# Altium PCB converter2.PcbDoc
Units mm, origin at the board's own origin, x right, y up, seen from the top; angles counter-clockwise.
Board outline 50 x 30 mm, 2 copper layers (Top Layer, Bottom Layer); 66 components, 35 nets, 206 pads, 51 vias.
Unrouted connection lines stored in the file: 1.
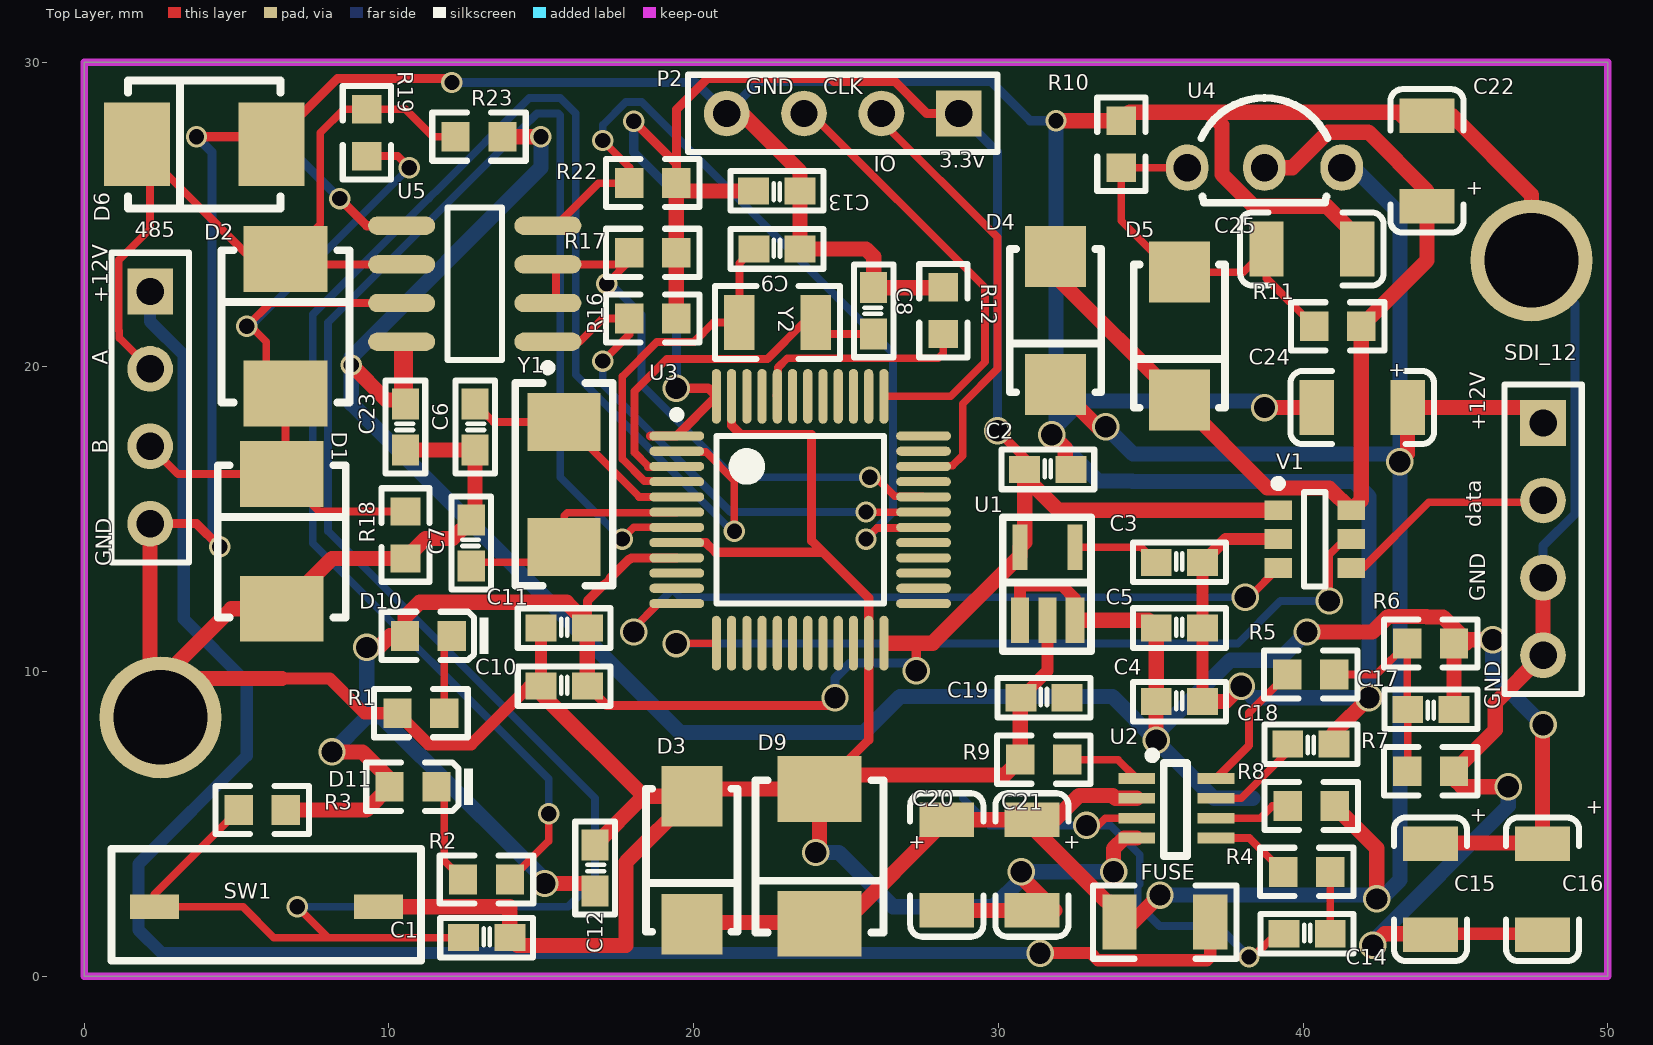
[diagram p0: Top Layer view]
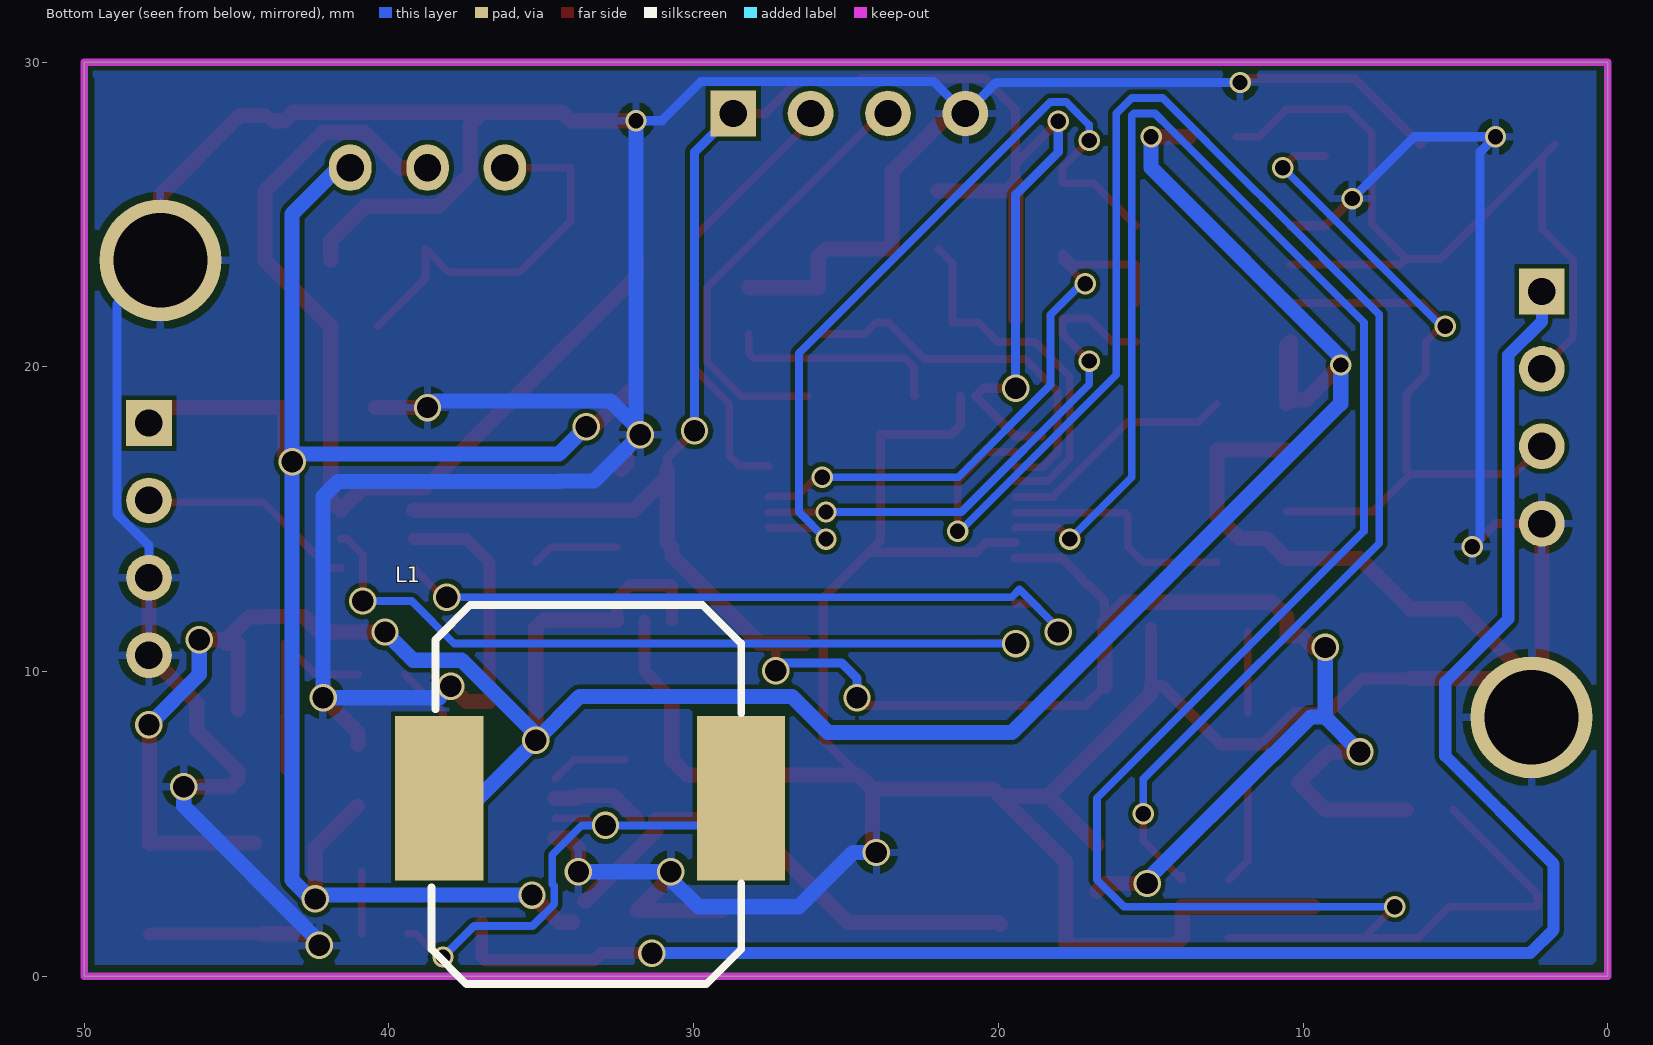
[diagram p1: Bottom Layer view, seen from below]

## Layer stack, top to bottom
Top Solder: solder mask 0.0102, Solder Resist, Dk 3.5
Top Layer: signal copper 0.0356
Dielectric 1: dielectric 0.32, FR-4, Dk 4.8
Bottom Layer: signal copper 0.0356
Bottom Solder: solder mask 0.0102, Solder Resist, Dk 3.5

## Board outline
0,0 50,0 50,30 0,30

## Design rules (kind name [scope] priority, off if disabled: settings)
Clearance Clearance_6 [All] p1 off: gap=0.152
Clearance Clearance_5 [InComponent('D6')] p2 off: gap=0
Clearance Clearance_4 [All] p3 off: gap=0.254
Clearance Clearance_1 [InComponent('U3')] p4: gap=0.2
Clearance Clearance_2 [InComponent('C24')] p5: gap=0.2
Clearance Clearance_3 [InComponent('C22')] p6: gap=0.2
Clearance [All] p7: gap=0.152
PolygonConnect [All] p1: connectstyle=Relief reliefconductorwidth=0.254 reliefentries=4 polygonreliefangle="90 Angle" airgapwidth=0.254
RoutingVias [All] p1: holewidth=0.5 width=0.7 viastyle="Through Hole" minholewidth=0.3 minwidth=0.5 maxholewidth=0.7 maxwidth=0.9
SolderMaskExpansion [All] p1: expansion=0.102
Width GND [InNet('GND')] p1: maxlimit=0.5 minlimit=0.2 preferedwidth=0.5
Width 3.3V [InNet('VCC3V3')] p2: maxlimit=0.5 minlimit=0.2 preferedwidth=0.5
Width 3.6V [InNet('VCC3.6V')] p3: maxlimit=0.5 minlimit=0.2 preferedwidth=0.5
Width 12V [InNet('12V')] p4: maxlimit=0.5 minlimit=0.2 preferedwidth=0.5
Width 12VIN [InNet('12VIN')] p5: maxlimit=0.5 minlimit=0.2 preferedwidth=0.4
Width 5V [InNet('5V')] p6: maxlimit=0.5 minlimit=0.2 preferedwidth=0.5
Width [All] p7: maxlimit=0.254 minlimit=0.2 preferedwidth=0.254
30 further rules are at their usual default settings.

## Components (designator, comment, footprint, x,y, rotation, side; value= is the part's Value field where it differs from the comment)
485 "485_4PIN" HDR1X4 2.159,22.479 r270 top (schematic designator header1)
C1 "104,0603" C0603 13.206,1.27 r180 top
C2 "电容106" C0603 31.625,16.637 r180 top
C3 "电容223" C0603 35.943,13.589 r180 top
C4 "电容105" C0603 35.943,9.017 r180 top
C5 "电容104" C0603 35.943,11.43 r180 top
C6 "20P,0603" C0603 12.827,18.032 r90 top
C7 "20P,0603" C0603 12.7,14.224 r270 top
C8 "10P,0603" C0603 25.908,21.844 r270 top
C9 "10P,0603" C0603 22.733,23.876 r180 top
C10 "104,0603" C0603 15.75,9.525 r180 top
C11 "104,0603" C0603 15.75,11.43 r180 top
C12 "104,0603" C0603 16.764,3.556 r90 top
C13 "104,0603" C0603 22.731,25.781 r0 top
C14 "0.1uF,0603" C0603 40.134,1.397 r180 top
C15 "Cap 1206" LC-1206+ 44.196,2.887 r270 top
C16 "Cap 1206" LC-1206+ 47.879,2.887 r270 top
C17 "33pF,0603" C0603 44.198,8.763 r0 top
C18 "0.1uF,0603" C0603 40.259,7.62 r0 top
C19 "1NF,0603" C0603 31.498,9.144 r180 top
C20 "Cap 1206" LC-1206+ 28.321,3.683 r270 top
C21 "Cap 1206" LC-1206+ 31.115,3.683 r270 top
C22 "Cap 1206" LC-1206+ 44.055,26.733 r90 top
C23 "100nF,0603" C0603 10.541,18.032 r270 top
C24 "Cap 1206" LC-1206+ 41.974,18.655 r180 top
C25 "Cap 1206" LC-1206+ 40.263,23.89 r0 top
D1 "P6SMB6.8CA" LC-SMB(DO-214AA)_S1 6.477,14.275 r270 top
D2 "P6SMB6.8CA" LC-SMB(DO-214AA)_S1 6.604,21.336 r270 top
D3 "Diode SMA/DO-214AC" LC-SMA(DO-214AC)_S1 19.939,3.81 r90 top
D4 "Diode SMA/DO-214AC" LC-SMA(DO-214AC)_S1 31.877,21.522 r90 top
D5 "Diode SMA/DO-214AC" LC-SMA(DO-214AC)_S1 35.941,21.014 r90 top
D6 "P6SMB6.8CA" LC-SMB(DO-214AA)_S1 3.937,27.305 r0 top
D9 "P6SMB18CA" LC-SMB(DO-214AA)_S1 24.13,3.937 r90 top
D10 "绿灯 0603" LC-0603_LED_S1 11.295,11.176 r180 top
D11 "黄灯 0603" LC-0603_LED_S1 10.787,6.223 r180 top
FUSE "16V5A,1206" LC-1206_R 35.467,1.778 r180 top
L1 "CDRH104R-5R2" SMD 38.348,5.842 r270 bottom
P2 "SWD" HDR1X4 28.702,28.321 r180 top
R1 "1K" LC-0603_R 11.049,8.636 r180 top
R2 "1K" LC-0603_R 13.2,3.175 r0 top
R3 "10K" LC-0603_R 5.842,5.461 r0 top
R4 "20R" LC-0603_R 40.124,3.429 r180 top
R5 "20K" LC-0603_R 40.251,9.906 r180 top
R6 "40.2K" LC-0603_R 44.188,10.922 r180 top
R7 "7.5K" LC-0603_R 44.188,6.731 r180 top
R8 "100K" LC-0603_R 40.267,5.588 r0 top
R9 "75K" LC-0603_R 31.488,7.112 r180 top
R10 "1.1K" LC-0603_R 34.036,27.313 r90 top
R11 "560R" LC-0603_R 41.14,21.336 r180 top
R12 "10K" LC-0603_R 28.194,21.852 r270 top
R16 "10K" LC-0603_R 18.661,21.59 r0 top
R17 "10K" LC-0603_R 18.661,23.749 r0 top
R18 "10K" LC-0603_R 10.541,14.486 r270 top
R19 "120R" LC-0603_R 9.271,27.686 r270 top
R22 "10K" LC-0603_R 18.661,26.035 r0 top
R23 "10K" LC-0603_R 12.954,27.559 r180 top
SDI_12 "SDI_4PIN" HDR1X4 47.879,18.161 r270 top (schematic designator header2)
SW1 "SW-PB_V" 3.8*6.1微动开关 9.652,2.286 r180 top
U1 "RT9193" SOT-23-5 31.612,12.884 r0 top
U2 "MP2315" TSOT23-8 33.782,3.698 r0 top
U3 "STM32F030(051)C8T6" 48P 23.495,14.986 r0 top
U4 "LM317L" TO-92-0.6 38.735,27.113 r0 top
U5 "SN65LBC184" SO8_N 12.814,22.733 r180 top
V1 "SDI_6" SOT23-6_L 40.386,14.351 r0 top
Y1 "晶振8MHZ" LC-SMD-5032_2P 15.748,16.147 r90 top
Y2 "晶振32.768KHZ" "LC-SMD-3215_2P FC - 135" 22.753,21.463 r0 top

## Footprints (in the part's own frame and the unit in brackets; to place one, negate y for a bottom-side part, rotate by r counter-clockwise, add the part's x,y. Pads: shape width x height; smd on the part's side, far side on the other; paste and mask are expansions set on the pad)
3.8*6.1微动开关 [mm]
  rect 1.6x0.8 smd: 1(0,0) 2(7.35,0)
  silkscreen extent -1.4,-1.91 8.76,1.78
48P [mm]
  oval 1.8x0.3 smd: 1(-4.05,2.75) 2(-4.05,2.25) 3(-4.05,1.75) 4(-4.05,1.25) 5(-4.05,0.75) 6(-4.05,0.25) 7(-4.05,-0.25) 8(-4.05,-0.75) 9(-4.05,-1.25) 10(-4.05,-1.75) 11(-4.05,-2.25) 12(-4.05,-2.75) 25(4.05,-2.75) 26(4.05,-2.25) 27(4.05,-1.75) 28(4.05,-1.25) 29(4.05,-0.75) 30(4.05,-0.25) 31(4.05,0.25) 32(4.05,0.75) 33(4.05,1.25) 34(4.05,1.75) 35(4.05,2.25) 36(4.05,2.75)
  oval 0.3x1.8 smd: 13(-2.75,-4.05) 14(-2.25,-4.05) 15(-1.75,-4.05) 16(-1.25,-4.05) 17(-0.75,-4.05) 18(-0.25,-4.05) 19(0.25,-4.05) 20(0.75,-4.05) 21(1.25,-4.05) 22(1.75,-4.05) 23(2.25,-4.05) 24(2.75,-4.05) 37(2.75,4.05) 38(2.25,4.05) 39(1.75,4.05) 40(1.25,4.05) 41(0.75,4.05) 42(0.25,4.05) 43(-0.25,4.05) 44(-0.75,4.05) 45(-1.25,4.05) 46(-1.75,4.05) 47(-2.25,4.05) 48(-2.75,4.05)
  silkscreen extent -4.17,-2.75 2.75,3.57, body extent -3.5,-3.5 3.5,3.5, height 1.6
C0603 [mil]
  rect 40x35 smd: 1(-29.92,0) 2(29.92,0)
  silkscreen extent -60,-26 60,26
HDR1X4 [mm] "Connector; Header; 4 Position"
  rect 1.5x1.5 hole 0.9: 1(0,0)
  round 1.5 hole 0.9: 2(2.54,0) 3(5.08,0) 4(7.62,0)
  silkscreen extent -1.27,-1.27 8.89,1.27
LC-0603_LED_S1 [mm]
  rect 0.93x0.98 smd: A(0.77,0) K(-0.77,0)
  silkscreen extent -1.98,-0.79 1.54,0.79, body extent -0.8,-0.4 0.8,0.4, height 0.6
LC-0603_R [mm]
  rect 0.93x0.98 smd: 1(-0.77,0) 2(0.77,0)
  silkscreen extent -1.53,-0.79 1.54,0.79, body extent -0.85,-0.4 0.85,0.4, height 0.56
LC-1206+ [mm]
  rect 1.13x1.8 smd: 1(-1.46,-0.014) 2(1.52,-0.014)
  silkscreen extent -2.33,-1.21 2.38,1.19, body extent -1.57,-0.83 1.63,0.77, height 1
LC-1206_R [mm]
  rect 1.13x1.8 smd: 1(-1.49,0) 2(1.49,0)
  silkscreen extent -2.36,-1.2 2.35,1.2, body extent -1.7,-0.86 1.65,0.87, height 0.85
LC-SMA(DO-214AC)_S1 [mm]
  rect 2x2 smd: 1(2.1,0) 2(-2.1,0)
  silkscreen extent -2.35,-1.5 2.35,1.5
LC-SMB(DO-214AA)_S1 [mm]
  rect 2.159x2.743 smd: 1(2.21,0) 2(-2.21,0)
  silkscreen extent -2.5,-2.1 2.5,2.1
"LC-SMD-3215_2P FC - 135" [mm]
  rect 1x1.8 smd: 1(-1.25,0) 2(1.25,0)
  silkscreen extent -2.05,-1.2 2.05,1.2
LC-SMD-5032_2P [mm]
  rect 1.9x2.4 smd: 1(-2.05,0) 2(2.05,0)
  silkscreen extent -3.32,-1.6 3.32,1.6
SMD [mm]
  rect 5.4x2.9 smd: 1(0,9.9) 2(0,0)
  silkscreen extent -6.35,-0.25 6.1,9.91
SO8_N [mm] "SOIC, 8-Leads, Body 4.9x3.9mm, Pitch 1.27mm, IPC Medium Density"
  oval 2.2x0.6 smd: 1(-2.4,1.905) 2(-2.4,0.635) 3(-2.4,-0.635) 4(-2.4,-1.905) 5(2.4,-1.905) 6(2.4,-0.635) 7(2.4,0.635) 8(2.4,1.905)
  silkscreen extent -2.53,-2.5 0.9,2.88, body extent -2,-2.5 2,2.5, height 1.75
SOT23-6_L [mm] "SOT23, 6-Leads, Body 2.9x1.6mm, Pitch 0.95mm, Lead Span 2.7mm, IPC High Density"
  rect 0.9x0.65 smd: 1(-1.2,0.95) 2(-1.2,0) 3(-1.2,-0.95) 4(1.2,-0.95) 5(1.2,0) 6(1.2,0.95)
  silkscreen extent -1.32,-1.55 0.35,1.95, body extent -0.9,-1.55 0.9,1.55, height 1.45
SOT-23-5 [mm]
  rect 0.6x1.5 smd: 1(-0.9,-1.2) 2(0,-1.2)
  rect 0.63x1.5 smd: 3(0.9,-1.2)
  rect 0.5x1.5 smd: 4(0.9,1.2) 5(-0.9,1.2)
  silkscreen extent -1.47,-2.21 1.43,2.18
TO-92-0.6 [mm] "TO-92"
  oval 1.397x1.524 hole 0.9: 1(-2.54,-0.57) 2(0,-0.57) 3(2.54,-0.57)
  silkscreen extent -2.08,-1.72 2.08,1.72, body extent -2.87,-2.09 2.87,2.09, height 10.33
TSOT23-8 [mm] "TSOT23-8"
  rect 1.2x0.35 smd: 1(0.762,2.794) 2(0.762,2.144) 3(0.762,1.494) 4(0.762,0.844) 5(3.362,0.844) 6(3.362,1.494) 7(3.362,2.144) 8(3.362,2.794)
  silkscreen extent 1.14,0.25 2.41,3.68

## Part data
C1 C2 C3 C4 C5 C6 C7 C8 C9 C10 C11 C12 C13 C14 C17 C18 C19 C23: library part Cap, "Capacitor"
C15 C16 C20 C21 C22 C24 C25: library part "Cap Pol2", "Polarized Capacitor (Axial)"
D1 D2 D6 D9: library part "SMB/DO-214AA P6SMB6.8CA", "TVS"
D3: library part "Diode 1N4007", "1 Amp General Purpose Rectifier"
D4 D5: library part "Diode 1N4001", "1 Amp General Purpose Rectifier"
D10: library part "0603 绿灯", "发光二极管"
D11: library part "0603 黄灯", "发光二极管"
FUSE: library part "1206 180Ω (1800) 1%", "贴片电阻"
L1: library part Inductor, "Inductor"
P2: library part "Header 4", "Header, 4-Pin"
R1 R2 R3 R4 R5 R6 R7 R8 R9 R10 R11 R12: library part Res2, "Resistor"
R16 R17 R18 R19 R22 R23: library part "Res Semi", "Semiconductor Resistor"
SW1: "SWITCH"
U1: library part RT9193X_5P
U3: library part STM32F030C8T6
U4: "Linear Regulator"
U5: library part SN75LBC184
Y1 Y2: library part "SMD-5032_2P 11.0592MHZ 20PF 20PPM", "贴片晶振"

## Free pads (board coordinates)
  round 4 hole 3.1: 1(2.5,8.5) 2(47.5,23.5)

## Via types
v1: diameter 0.9, hole 0.7, Top Layer to Bottom Layer, 30 vias
v2: diameter 0.7, hole 0.5, Top Layer to Bottom Layer, 21 vias

## Nets (pads, with @x,y where several pads share a name; then routed paths per layer and width w, separated by ;. In a path a pad name is that pad's centre, name@x,y a point inside that pad or via, vN(x,y) a via of type N, cw(c..) or ccw(c..) an arc to the next point about the centre after c; other vN are vias at no path point)
5V: C4.2 C5.2 C15.1 C16.1 C17.2 C23.1 L1.2 R6.1 R23.1 U1.1 U1.3 U5.8 | length 92.1
  Top Layer w0.4: U1.1 30.712,12.805 30.743,12.836 32.079,12.836 32.512,12.403 U1.3
  Top Layer w0.5: v2(8.763,20.066) 9.91,18.919 10.414,18.919 U5.8 10.541,20.701 C23.1 ; R23.1 v2(14.986,27.559) ; U1.3 34.929,11.684 C5.2 C4.2 35.179,9.013 v1(35.179,7.747) ; v1(40.132,11.303) 42.275,11.303 42.786,11.814 44.05,11.814 44.07,11.794 44.594,11.794 R6.1@45.339,11.049 ; C15.1@44.421,4.377 C16.1@47.865,4.377 ; C17.2 R6.1@44.958,10.906 ; v1(46.228,11.049) R6.1@45.339,11.049 ; C16.1 C16.1@47.865,4.377 ; v1@47.865,8.241 C16.1@47.865,4.377 ; R6.1@45.212,11.049 45.339,10.922 R6.1 45.085,11.049 R6.1@45.212,11.049 ; R6.1@45.212,11.049 R6.1@45.339,11.049
  Bottom Layer w0.5: v2(14.986,27.559) 14.986,26.543 8.763,20.32 v2(8.763,20.066) 8.763,18.796 19.554,8.005 25.596,8.005 26.772,9.181 33.745,9.181 v1(35.179,7.747) ; L1.2 37.084,5.842 v1(35.179,7.747) ; v1(40.132,11.303) 39.206,10.377 37.62,10.377 35.179,7.936 v1(35.179,7.747) ; v1(46.228,11.049) 46.228,9.906 v1(47.879,8.255)
12V: C20.1 C21.1 C24.1 D3.2 D4.2 D9.2 FUSE.2 R8.2 SDI_12.1 U2.2 U4.3 | length 75.8
  Top Layer w0.5: D3.2 19.998,1.769 24.933,1.769 C20.1 ; C20.1@28.77,5.139 29.083,5.139 29.085,5.141 31.242,5.141 31.242,4.764 33.535,2.471 FUSE.2@33.586,2.471 ; C21.1@31.863,5.141 32.654,5.932 33.754,5.932 33.844,5.842 U2.2 ; D4.2 33.265,18.034 v1(33.528,18.034) ; FUSE.2 34.417,1.778 v1(35.306,2.667) ; R8.2 42.418,4.207 v1(42.418,2.54) ; v1(43.18,16.891) 43.434,17.145 C24.1 47.371,18.669 SDI_12.1
  Bottom Layer w0.5: v1(33.528,18.034) 34.417,17.145 42.926,17.145 v1(43.18,16.891) ; v1(35.306,2.667) 42.345,2.667 42.418,2.594 v1(42.418,2.54) 42.559,2.54 43.18,3.161 v1(43.18,16.891) ; U4.3 41.656,26.543 43.18,25.019 v1(43.18,16.891)
12VIN: 485.1 FUSE.1 | length 60.7
  Top Layer w0.4: 485.1 485.1@2.286,22.606 ; v1(31.369,0.762) 33.03,0.762 33.266,0.526 36.848,0.526 36.957,0.635 FUSE.1
  Bottom Layer w0.4: 485.1 2.159,21.497 3.261,20.395 3.261,11.725 5.334,9.652 5.334,7.239 1.778,3.683 1.778,1.524 2.54,0.762 v1(31.369,0.762)
485A: 485.2 D2.2 D6.2 R19.1 R23.2 U5.6 | length 27.9
  Top Layer w0.254: D6.2 D6.2@2.159,26.873 ; 485.2 1.143,20.955 1.143,21.179 1.13,21.192 1.13,23.508 2.159,24.537 D6.2@2.159,26.873 ; U5.6 6.782,23.368 D2.2 ; R23.2 11.446,27.559 10.541,28.464 8.525,28.464 7.747,27.686 7.747,24.689 D2.2 ; D6.2@2.159,26.873 5.486,23.546 D2.2
485B: 485.3 D1.2 D2.1 R18.1 R19.2 U5.7 | length 29.2
  Top Layer w0.254: 485.3 3.073,16.485 D1.2 ; R19.2@9.271,26.924 10.287,26.924 v2(10.668,26.543) ; U5.7 6.096,22.098 v2(5.334,21.336) 5.461,21.336 5.969,20.828 5.969,19.761 D2.1 6.604,16.612 D1.2 ; R18.1 7.706,15.256 D1.2
  Bottom Layer w0.254: v2(5.334,21.336) 5.461,21.336 v2(10.668,26.543)
BOOT0: R12.2 U3.44 | length 7.2
  Top Layer w0.254: U3.44@22.722,19.059 U3.44 22.768,19.059 22.768,19.984 23.068,20.284 28.031,20.284 28.194,20.447 R12.2
GND: 485.4 C1.1 C2.1 C3.1 C4.1 C5.1 C6.1 C7.1 C8.1 C9.1 C10.2 C11.2 C12.2 C13.2 C15.2 C16.2 C18.2 C19.2 C20.2 C21.2 C22.2 C23.2 C24.2 C25.2 D1.1 D3.1 D6.1 D9.1 P2.4 pad.1 pad.2 R1.2 R7.1 R9.2 R10.2 R12.1 R18.2 SDI_12.3 SDI_12.4 SW1.1 U1.2 U2.4 U3.8 U3.23 U3.47 U5.5 V1.2 | length 303.7
  Top Layer w0.3: 485.4 3.683,14.859 v2(4.445,14.097) ; v2(3.683,27.559) 5.893,27.559 D6.1 8.306,29.464 11.938,29.464 v2(12.065,29.337) ; v2(8.382,25.527) 9.271,24.638 U5.5 ; U3.8 20.402,14.236 20.719,13.919 24.245,13.919 ; U3.47 21.245,18.079 21.538,17.786 22.452,17.786 ; 22.538,17.786 23.87,17.786 23.87,14.294 24.245,13.919 ; D9.1@24.587,6.604 25.745,7.762 U3.23 25.745,12.419 24.245,13.919
  Top Layer w0.4: 6.485,9.779 8.054,9.779 9.197,8.636 R1.2 11.297,7.618 12.698,7.618 14.605,9.525 C10.2 C11.2 ; C19.2 31.612,10.018 U1.2 ; C4.1 C5.1 C3.1 37.465,14.351 V1.2 ; C15.2@44.196,1.397 C16.2@47.879,1.397
  Top Layer w0.5: 485.4 2.159,8.841 pad.1 pad.1@3.779,9.779 ; 6.485,9.779 pad.1@3.779,9.779 ; SW1.1 11.795,2.286 11.798,2.283 13.062,2.283 13.065,2.286 13.335,2.286 13.338,2.283 13.966,2.283 C1.1 14.22,1.016 17.78,1.016 17.78,3.751 D3.1 ; C23.2 C6.1 C7.1@12.827,15.111 ; C7.1 12.09,14.374 11.199,14.374 R18.2 8.128,13.716 D1.1 4.826,12.065 2.54,9.779 pad.1@3.779,9.779 ; C10.2 14.99,9.288 18.368,5.91 ; C12.2 18.358,5.91 18.368,5.91 ; P2.4 21.59,28.321 23.491,26.42 C13.2 23.491,23.878 C9.1 25.654,23.876 25.908,23.622 C8.1 28.176,22.604 R12.1 ; v1(24.003,4.064) 24.13,4.191 D9.1 ; C20.2@29.083,2.159 31.861,2.159 30.754,3.266 v1(30.754,3.429) ; C19.2 30.718,9.124 R9.2 30.21,6.604 24.587,6.604 D9.1 ; v1(31.75,17.78) 32.194,17.335 32.194,16.828 C2.1 ; v2(31.893,28.083) R10.2 34.312,28.359 43.142,28.359 43.418,28.083 C22.2@43.787,28.083 ; v1(33.782,3.429) 33.782,4.191 34.133,4.542 U2.4 ; C4.1 37.465,9.017 v1(37.973,9.525) ; 37.012,28.266 37.338,27.94 37.338,26.32 38.385,25.273 40.79,25.273 41.908,24.155 C25.2@41.908,23.495 ; v1(38.735,18.669) C24.2 ; C18.2 41.019,7.999 v1(42.164,9.144) ; v1(42.291,1.016) 42.672,1.397 C15.2@44.196,1.397 ; C22.2 44.899,28.253 47.5,25.652 pad.2 ; v1(46.736,6.223) 45.212,6.223 44.958,6.477 R7.1 46.309,8.082 46.309,8.971 SDI_12.4 SDI_12.3 ; 18.368,5.91 D3.1 ; D3.1 20.176,6.147 D9.1
  Bottom Layer w0.3: 485.4 485.4@2.759,14.859 ; v2(4.445,14.097) 4.191,14.351 4.191,27.051 v2(3.683,27.559) 6.35,27.559 v2(8.382,25.527) ; v2(12.065,29.337) 20.066,29.337 P2.4 22.134,29.373 29.754,29.373 31.044,28.083 v2(31.893,28.083) ; pad.2 48.931,22.069 48.931,15.185 47.879,14.133 SDI_12.3
  Bottom Layer w0.5: pad.1@2.413,10.087 pad.1@2.5,10 ; v1(24.003,4.064) 24.765,4.064 26.543,2.286 29.845,2.286 30.754,3.195 v1(30.754,3.429) v1(33.782,3.429) ; v2(31.893,28.083) v1@31.893,18.05 ; v1(37.973,9.525) 38.354,9.144 v1(42.164,9.144) 42.164,15.748 41.673,16.239 34.401,16.239 34.384,16.256 33.274,16.256 v1(31.75,17.78) 31.893,17.923 v1@31.893,18.05 ; v1(38.735,18.669) 38.518,18.886 32.729,18.886 v1@31.893,18.05 ; v1(42.291,1.016) 42.291,1.143 46.736,5.588 v1(46.736,6.223)
NetC3_2: C3.2 U1.4 | length 2.9
  Top Layer w0.254: U1.4 34.688,14.084 C3.2
NetC14_1: C14.1 R4.1 | length 2
  Top Layer w0.254: C14.1 R4.1
NetC14_2: C14.2 L1.1 U2.3 | length 15.8
  Top Layer w0.254: v1(32.893,4.953) 33.274,4.953 33.513,5.192 U2.3 U2.3@34.529,5.207 ; v2(38.227,0.635) 38.358,0.635 39.12,1.397 C14.2
  Bottom Layer w0.254: L1.1@28.829,5.842 29.718,4.953 v1(32.893,4.953) 33.67,4.953 34.638,3.985 34.638,3.03 34.577,2.969 34.577,2.365 35.291,1.651 37.211,1.651 v2(38.227,0.635)
NetC17_1: C17.1 R5.1 R6.2 R7.2 | length 7.1
  Top Layer w0.254: R5.1 42.402,9.906 R6.2 43.418,8.783 C17.1 43.34,8.665 43.438,8.567 43.438,6.751 R7.2
NetC18_1: C18.1 U2.7 | length 3.2
  Top Layer w0.254: U2.7 37.973,5.842 39.499,7.368 C18.1
NetC19_1: C19.1 R9.1 U2.1 | length 2.5
  Top Layer w0.254: R9.1 33.924,7.112 U2.1
NetC25_1: C25.1 D5.1 R10.1 R11.2 U4.1 | length 12.9
  Top Layer w0.254: U4.1 R10.1 34.036,24.8 35.722,23.114 D5.1 38.041,23.114 C25.1 38.803,22.903 R11.2 R11.2@40.388,21.354
NetD10_K: D10.K R1.1 | length 2.7
  Top Layer w0.254: R1.1@11.811,8.636 D10.K@11.811,11.303
NetD11_K: D11.K R2.1 | length 3.3
  Top Layer w0.254: D11.K@11.811,6.223 11.811,3.794 R2.1
NetR4_2: R4.2 U2.5 | length 2.7
  Top Layer w0.254: U2.5 38.241,4.542 R4.2
NetR5_2: R5.2 U2.8 | length 4.4
  Top Layer w0.254: U2.8 38.227,7.575 38.227,8.652 R5.2
NetR8_1: R8.1 U2.6 | length 2.5
  Top Layer w0.254: U2.6 38.593,5.192 38.989,5.588 R8.1
NetSDI_12_2: SDI_12.2 V1.4 | length 7.2
  Top Layer w0.254: V1.4 41.969,13.401 44.129,15.561 47.819,15.561 SDI_12.2
OSCIN: C6.2 U3.5 Y1.2 | length 7.9
  Top Layer w0.254: C6.2 13.422,18.197 Y1.2 18.209,15.736 U3.5
OSCOUT: C7.2 U3.6 Y1.1 | length 7.9
  Top Layer w0.254: C7.2@12.827,13.591 15.242,13.591 Y1.1 15.748,15.113 15.848,15.213 19.422,15.213 U3.6
PA2: U3.12 V1.3 | length 24.2
  Top Layer w0.254: v1(18.034,11.303) 18.034,11.43 18.84,12.236 U3.12 ; v1(38.1,12.446) 38.231,12.446 V1.3
  Bottom Layer w0.254: v1(18.034,11.303) 18.034,11.43 19.304,12.7 19.558,12.446 v1(38.1,12.446)
PA3: U3.13 V1.5 | length 25.8
  Top Layer w0.254: v1(19.431,10.922) 19.445,10.936 U3.13 ; v1(40.857,12.319) 40.857,13.842 41.366,14.351 V1.5
  Bottom Layer w0.254: v1(19.431,10.922) 37.861,10.922 39.258,12.319 v1(40.857,12.319)
PA11/~RE: R17.1 U3.32 U5.2 U5.3 | length 19.8
  Top Layer w0.254: U5.2@15.481,22.098 15.481,23.368 17.51,23.368 R17.1 17.891,23.479 v2(17.145,22.733) ; v2(25.781,16.383) 25.973,16.383 26.597,15.759 27.522,15.759 U3.32
  Bottom Layer w0.254: v2(17.145,22.733) 17.272,22.733 18.288,21.717 18.288,19.416 21.321,16.383 v2(25.781,16.383)
PC13: R2.2 U3.2 | length 54.1
  Top Layer w0.254: R2.2@13.97,3.302 R2.2 15.24,4.445 v2(15.24,5.334) ; U3.2@19.422,17.213 U3.2 19.468,17.213 20.393,17.213 21.336,16.27 v2(21.336,14.605)
  Bottom Layer w0.254: v2(15.24,5.334) 15.24,6.477 7.499,14.218 7.499,21.723 11.309,25.533 11.678,25.901 14.605,28.829 15.621,28.829 16.129,28.321 16.129,19.746 21.27,14.605 v2(21.336,14.605)
PC14: C8.2 U3.3 Y2.2 | length 12.6
  Top Layer w0.254: U3.3 19.422,16.713 18.497,16.713 18.497,16.759 18.059,17.197 18.059,19.202 19.12,20.263 22.422,20.263 23.622,21.463 Y2.2 24.382,21.084 C8.2
PC15: C9.2 U3.4 Y2.1 | length 12
  Top Layer w0.254: U3.4@19.468,16.259 U3.4 19.422,16.259 18.377,16.259 17.653,16.983 17.653,19.685 18.789,20.821 20.012,20.821 20.654,21.463 Y2.1 21.503,23.406 C9.2
RESET: C1.2 R3.1 SW1.2 U3.7 | length 75.6
  Top Layer w0.254: R3.1 2.302,2.691 SW1.2 5.207,2.286 6.223,1.27 8.001,1.27 ; v2(6.985,2.286) 8.001,1.27 ; C1.2 8.001,1.27 ; v2(17.653,14.351) 18.038,14.736 U3.7 U3.7@19.468,14.713
  Bottom Layer w0.254: v2(6.985,2.286) 15.875,2.286 16.764,3.175 16.764,5.842 8.001,14.605 8.001,21.463 14.357,27.819 14.858,28.321 15.555,28.321 15.621,28.255 15.621,16.383 v2(17.653,14.351)
SWCLK: P2.3 U3.37 | length 14.5
  Top Layer w0.254: P2.3 23.845,28.321 29.566,22.6 29.566,20.168 28.434,19.036 U3.37
SWIO: P2.2 U3.34 | length 14.7
  Top Layer w0.254: P2.2 26.162,28.067 29.972,24.257 29.972,19.939 28.829,18.796 28.829,17.095 28.493,16.759 27.568,16.759 U3.34
USART1_RX: R16.1 U3.31 U5.1 | length 17.2
  Top Layer w0.254: U5.1@15.481,20.828 16.256,20.828 17.018,21.59 R16.1 17.891,21.066 v2(17.018,20.193) ; v2(25.654,15.24) v2@25.715,15.24 ; 26.035,15.232 26.031,15.236 U3.31
  Bottom Layer w0.254: v2(17.018,20.193) 17.018,19.431 21.209,15.24 v2(25.654,15.24)
USART1_TX: R22.1 U3.30 U5.4 | length 27.1
  Top Layer w0.254: U5.4@15.481,24.638 16.878,26.035 R22.1 17.891,26.559 v2(17.018,27.432) ; v2(25.654,14.351) 25.914,14.611 26.017,14.713 27.522,14.713 U3.30
  Bottom Layer w0.254: v2@17.046,27.432 v2(17.018,27.432) 17.018,27.941 17.773,28.696 18.028,28.696 18.034,28.702 18.04,28.696 18.295,28.696 26.543,20.448 26.543,15.239 v2(25.654,14.351)
VCC3.6V: C22.1 D4.1 D5.2 R11.1 U4.2 V1.6 | length 31.7
  Top Layer w0.5: D4.1 31.877,22.978 D5.2 38.827,16.028 40.859,16.028 V1.6 41.91,15.625 R11.1 44.069,23.495 C22.1 44.069,25.781 42.143,27.707 40.819,27.707 39.655,26.543 U4.2
VCC3V3: C2.2 C10.1 C11.1 C12.1 C13.1 D10.A D11.A P2.1 R3.2 R16.2 R17.2 R22.2 U1.5 U3.1 U3.9 U3.24 U3.48 V1.1 | length 113.1
  Top Layer w0.3: C10.1 17.145,8.89 24.638,8.89 v1(24.638,9.144) ; C11.1@16.51,11.599 16.51,12.319 17.036,12.845 17.073,12.845 17.25,13.022 17.25,13.059 17.89,13.699 17.923,13.699 17.96,13.736 U3.9 ; v2(18.034,28.067) 19.431,26.67 ; U3.1@18.586,17.736 U3.1 U3.48 20.477,19.304 v1(19.431,19.304) ; R22.2 19.431,26.67 ; U3.24 U3.24@26.275,10.936 ; v1@27.178,10.033 v1(27.305,10.033) 27.305,10.936 ; P2.1 27.65,28.321 26.598,29.373 24.602,29.373 24.511,29.464 20.447,29.464 19.431,28.448 19.431,26.67 ; v1(29.972,17.907) 30.865,17.014 C2.2
  Top Layer w0.5: R3.2 9.255,5.461 D11.A ; v1(8.128,7.366) 9.128,7.366 D11.A@10.144,6.35 ; v1(9.271,10.795) 9.652,10.795 10.033,11.176 D10.A 10.525,11.795 11.007,12.277 15.833,12.277 16.51,11.599 C11.1 C10.1 ; v1(15.113,3.048) 16.512,3.048 C12.1 ; R16.2 R17.2 R22.2 19.685,25.781 C13.1 ; U3.24@26.345,10.936 27.305,10.936 27.844,10.936 30.712,13.804 U1.5 30.865,14.237 C2.2@30.865,16.4 ; C2.2 C2.2@30.865,16.4 ; V1.1 31.964,15.301 C2.2@30.865,16.4
  Bottom Layer w0.3: v2(18.034,28.067) 18.034,27.051 19.431,25.654 v1(19.431,19.304) ; v1(24.638,9.144) 24.638,9.779 25.146,10.287 27.051,10.287 v1(27.305,10.033) ; P2.1 29.972,27.051 v1(29.972,17.907)
  Bottom Layer w0.5: v1(8.128,7.366) 9.271,8.509 ; v1(9.271,10.795) 9.271,8.509 ; v1(15.113,3.048) 15.113,3.175 11.033,7.255 11.017,7.239 9.747,8.509 9.271,8.509
pads on no net: U3.10 U3.11 U3.14 U3.15 U3.16 U3.17 U3.18 U3.19 U3.20 U3.21 U3.22 U3.25 U3.26 U3.27 U3.28 U3.29 U3.33 U3.35 U3.36 U3.38 U3.39 U3.40 U3.41 U3.42 U3.43 U3.45 U3.46

## Polygon pours and split planes (outlines as drawn)
GND on Bottom Layer "Bottom Layer-No Net" (solid, pour order 2): 49.784,29.591 49.657,29.464 49.657,0.381 0.508,0.381 0.381,0.508 0.381,29.718 49.276,29.718 49.53,29.972

## Keep-outs
Keep-Out Layer:
  the board outline again, w0.254

## Silkscreen, mask and mechanical layers (free items; w line width, h text height)
Top Overlay:
  text "GND" at 21.717,28.956 h0.5
  text "CLK" at 24.257,28.956 h0.5
  text "3.3v" at 28.067,26.543 h0.5
  text "IO" at 25.908,26.416 h0.5
  text "+" at 45.339,25.654 h0.5
  text "+12V" at 0.762,22.098 h0.5 r90
  text "A" at 0.762,20.066 h0.5 r90
  text "+" at 42.799,19.685 h0.5
  text "+12V" at 45.974,17.907 h0.5 r90
  text "B" at 0.762,17.145 h0.5 r90
  text "data" at 45.847,14.732 h0.5 r90
  text "GND" at 0.889,13.462 h0.5 r90
  text "GND" at 45.974,12.319 h0.5 r90
  text "GND" at 46.482,8.763 h0.5 r90
  text "+" at 49.276,5.334 h0.5
  text "+" at 45.466,5.08 h0.5
  text "+" at 27.051,4.191 h0.5
  text "+" at 32.131,4.191 h0.5